# Altium PCB sigjumper-top.PcbDoc (part 4 of 5)
Units mil, origin at the board's own origin, x right, y up, seen from the top; angles counter-clockwise.
Board outline 7874.02 x 2559.06 mil, 14 copper layers (TOP, P1(GND), S1(V), P2(GND), S2(H), P3(GND), S3(V12/V2V5), S4(VDDR), P4(GND), S5(V), P5(GND), S6(H), P6(GND), BOT), stack 115.1 mil thick; 22 components, 186 nets, 824 pads, 732 vias.
Unrouted connection lines stored in the file: 341.
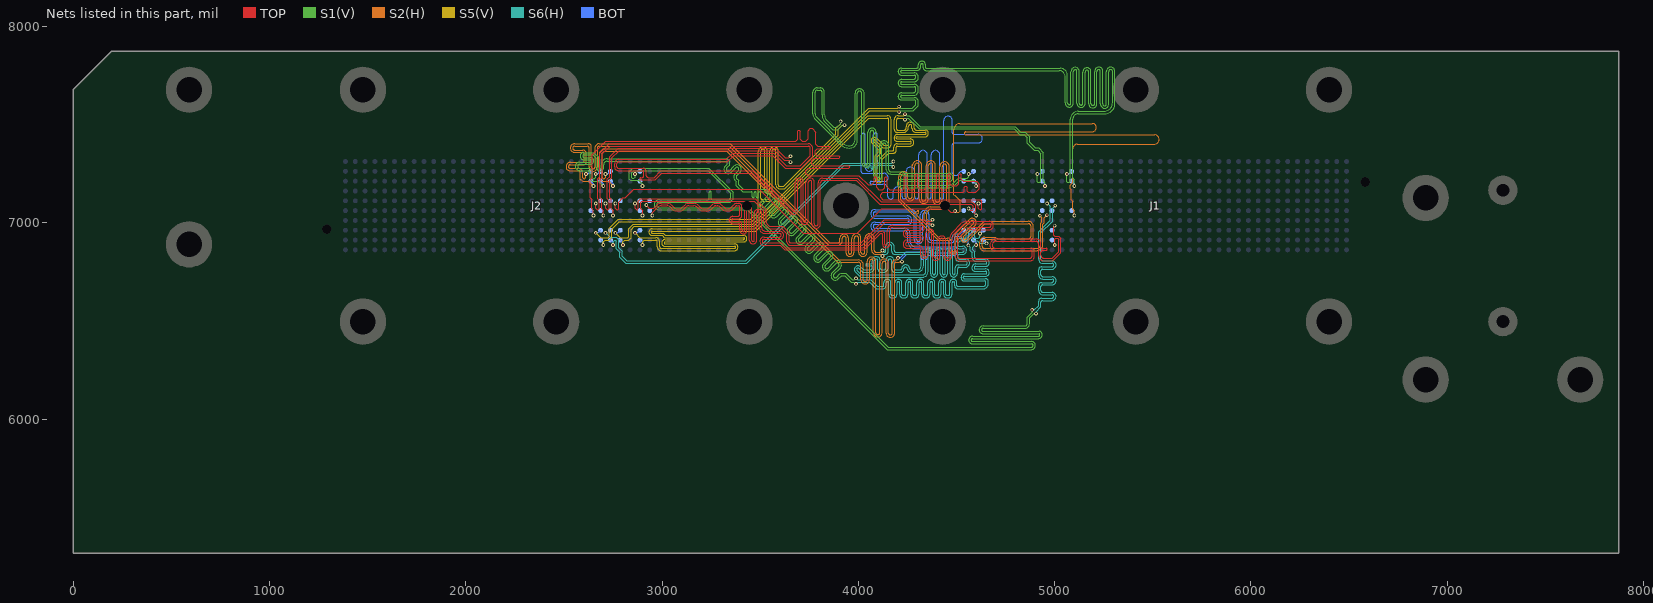
[diagram p16: the nets of this part, all layers, seen from the top]

## Via types
v1: diameter 19, hole 10, TOP to BOT, tented both sides, 732 vias

## Nets (pads, with @x,y where several pads share a name; then routed paths per layer and width w, separated by ;. In a path a pad name is that pad's centre, name@x,y a point inside that pad or via, vN(x,y) a via of type N, cw(c..) or ccw(c..) an arc to the next point about the centre after c; other vN are vias at no path point) (continued)
IL1.DDR.G2.D4_P: J1.375 J2.255 | length 5775.4
  TOP w4: v1(2650.7,7036.61) 2650.7,7061.3 2642,7070 2642,7119.97 2634,7127.97 2634,7219 2645,7230 2645,7345 2714,7414 3680,7414 3690,7424 3690,7467 3695,7472 3698,7472 3703,7467 3703,7426.03 3715.03,7414 3730.97,7414 3745,7428.03 3745,7469.03 3755.97,7480 3764.09,7480 3783,7461.09 3783,7400.03 3793.03,7390 3853.03,7390 3858.03,7385 3858.03,7382 3853.03,7377 3790.03,7377 3780,7366.97 3780,7350.03 3790.03,7340 3900.03,7340 3905.03,7335 3905.03,7332 3900.03,7327 3775,7327 3762.97,7314.97 3762.97,7300.03 3773,7290 3950.03,7290 3955.03,7285 3955.03,7282 3950.03,7277 3745.03,7277 3733,7264.97 3733,7252.03 3745.03,7240 4003.03,7240 4050.03,7193 4068,7193 4079.97,7204.97 4079.97,7228 4084.97,7233 4087.97,7233 4092.97,7228 4092.97,7180.03 4105,7168 4124.97,7168 4134.97,7178 4134.97,7228 4139.97,7233 4142.97,7233 4147.97,7228 4147.97,7180.03 4160,7168 4225,7168 4235,7178 4235,7228 4240,7233 4243,7233 4248,7228 4248,7180.03 4260.03,7168 4280,7168 4290,7178 4290,7245 4295,7250 4298,7250 4303,7245 4303,7180.03 4315.03,7168 4335,7168 4345,7178 4345,7245 4350,7250 4353,7250 4358,7245 4358,7180.03 4370.03,7168 4390,7168 4400,7178 4400,7245 4405,7250 4408,7250 4413,7245 4413,7180.03 4425.03,7168 4444.97,7168 4454.97,7178 4454.97,7245 4459.97,7250 4462.97,7250 4467.97,7245 4467.97,7197.06 4478.03,7187 4500,7187 4511.97,7198.97 4511.97,7245 4516.97,7250 4519.97,7250 4524.97,7245 4524.97,7230 4524.97,7220.06 4535.03,7210 4603.03,7210 4616.51,7196.51 4616.51,7173.49 4598.03,7155 4560,7155 4555,7160 4555,7181 4550,7186 4545,7186 4540,7181 4540,7160 4535,7155 4125.03,7155 4113,7142.97 4113,7130.03 4125.03,7118 4620.03,7118 4629.61,7108.42 4629.61,7070 4624.61,7065 4619.61,7065 4611.81,7072.8 v1(4611.81,7098.11)
  BOT w4: J2.255@2637.21,7061.61 2650.71,7048.11 v1(2650.7,7036.61) ; v1(4611.81,7098.11) 4623.31,7098.11 J1.375@4636.81,7111.61
IL1.DDR.G2.S_N: J1.379 J2.259 | length 5807.9
  S2(H) w4: 2555,7390 2620,7390 cw(c2620,7382) 2628,7382 2628,7285 ccw(c2650,7285) 2650,7263 ccw(c2650,7283) 2670,7283 2670,7380 cw(c2680,7380) 2680,7390 3343.03,7390 3848.03,6885 3895,6885 ccw(c3895,6908) 3918,6908 3918,6920.11 cw(c3928,6920.04) 3938,6920.04 ; 2555.02,7390 ccw(c2555.02,7380) 2554.96,7370 2595,7370 cw(c2595,7350) 2615,7350 2615,7310.03 cw(c2599.97,7310.03) 2599.97,7295 2533,7295 ccw(c2533,7285) 2523,7285 ccw(c2531,7285) 2531,7277 2573,7277 cw(c2573,7255) 2595,7255 2595,7230 2600,7225 2605,7225 2612.2,7232.2 v1(2612.2,7248.11) ; 3938,6920 3938,6845 ccw(c3955,6845) 3955,6828 3956.05,6828 ccw(c3956.05,6849.96) 3978,6849.96 3978,6918.96 cw(c3991,6918.96) 3991,6931.96 cw(c3991,6921.96) 4001,6921.96 4001,6849.93 ccw(c4023,6849.96) 4045,6849.96 4045,6918.96 cw(c4058,6918.96) 4058,6931.96 cw(c4058,6921.96) 4068,6921.96 4068,6859.93 ccw(c4090,6860) 4090,6838 4115,6838 v1(4123,6830)
  S6(H) w4: v1(4123,6830) 4131,6838 4135,6838 ccw(c4135,6855) 4152,6855 4152,6880 cw(c4160,6880) 4160,6888 cw(c4160,6878) 4170,6878 4170,6855.03 ccw(c4187.03,6855.03) 4187.03,6838 4312,6838 cw(c4312,6830) 4320,6830 4320,6780 cw(c4300,6780) 4300,6760 4267.08,6760 cw(c4267.08,6765.19) 4261.96,6764.36 ; 4261.89,6765.19 ccw(c4267.08,6765.19) 4261.96,6764.36 ; 4355,6855 4355,6854 ; 4368,6855 4368,6854 ; 4532,6880 4515,6880 cw(c4515,6890) 4505,6890 4505,6894.09 4518.91,6908 4540.07,6908 ccw(c4540,6930) 4562,6930 4562,6952 cw(c4570,6952) 4570,6960 cw(c4570,6950) 4580,6950 4580,6923.03 ccw(c4595.03,6923.03) 4595.03,6908 4605,6908 4618,6895 v1(4652.8,6895) ; 4532.03,6880 cw(c4532,6860) 4552,6860 cw(c4530,6860) 4530,6838 4513,6838 ccw(c4513,6830) 4505,6830 4505,6825 ccw(c4515,6825) 4515,6815 4547,6815 cw(c4547,6795) 4567,6795 cw(c4545,6795) 4545,6773 4513,6773 ccw(c4513,6765) 4505,6765 4505,6743 cw(c4485,6743) 4485,6723 cw(c4485,6740) 4468,6740 4468,6855 ccw(c4465,6855) 4465,6858 4460,6858 ccw(c4460,6853) 4455,6853 4455,6743 cw(c4435,6743) 4435,6723 cw(c4435,6740) 4418,6740 4418,6854 ccw(c4412,6854) 4412,6860 4411.03,6860 ccw(c4411.03,6853.97) 4405,6853.97 4405,6743 cw(c4385,6743) 4385,6723 cw(c4385,6740) 4368,6740 4368,6854 ; 4261.96,6764.36 ccw(c4240,6763) 4240,6785 ccw(c4240,6765) 4220,6765 cw(c4215,6765) 4215,6760 4190,6760 cw(c4190,6768) 4182,6768 4182,6805 ccw(c4160,6805) 4160,6827 ccw(c4160,6807) 4140,6807 4140,6770 cw(c4130,6770) 4130,6760 4120,6760 cw(c4120,6768) 4112,6768 4112,6805 ccw(c4090,6805) 4090,6827 ccw(c4090,6807) 4070,6807 4070,6795 cw(c4065,6795) 4065,6790 4042,6790 ccw(c4042,6785) 4037,6785 ccw(c4042,6785) 4042,6780 4065,6780 cw(c4065,6775) 4070,6775 4070,6770 cw(c4060,6770) 4060,6760 4026.21,6760 4010.27,6775.95 ccw(c3998.26,6763.91) 3986.24,6775.93 3984.12,6773.81 ccw(c3996.14,6761.79) 3984.1,6749.79 4010.89,6723 4328,6723 ccw(c4328,6750) 4355,6750 4355,6854 ; 4355,6854 cw(c4360,6854) 4360,6859 4363,6859 cw(c4363,6854) 4368,6854
  BOT w4: v1(2612.2,7248.11) 2623.71,7248.11 J2.259@2637.21,7261.61 ; J1.379@4636.81,6911.61 4650.31,6898.11 4650,6897.8 v1(4652.8,6895)
IL1.DDR.G2.S_P: J1.378 J2.258 | length 5804.8
  S2(H) w4: v1(2650.7,7186.61) 2627.32,7210 2595,7210 2583,7222 2583,7255 ccw(c2573,7255) 2573,7265 2531,7265 cw(c2531,7285) 2511,7285 cw(c2533,7285) 2533,7307 2595,7307 ccw(c2595,7315) 2603,7315 2603,7350 ccw(c2595,7350) 2595,7358 2555.02,7358 cw(c2555.02,7380) 2555,7402 2624.97,7402 cw(c2624.97,7386.97) 2640,7386.97 2640,7285 ccw(c2650,7285) 2650,7275 ccw(c2650,7283) 2658,7283 2658,7380 cw(c2680,7380) 2680,7402 3348,7402 3853,6897 3895,6897 ccw(c3895,6908) 3906,6908 3906,6920.04 cw(c3928,6920.04) 3950,6920.07 ; 3950,6920 3950,6845 ccw(c3955,6845) 3955,6840 3956.05,6840 ccw(c3956.05,6849.96) 3966,6849.96 3966,6918.96 cw(c3991,6918.96) 3991,6943.96 cw(c3991,6921.96) 4013,6921.96 4013,6849.96 ccw(c4023,6849.96) 4033,6849.89 ; 4033,6849.96 4033,6918.96 cw(c4058,6918.96) 4058,6943.96 cw(c4058,6921.96) 4080,6921.96 4080,6859.96 ccw(c4090,6860) 4090,6850 4115,6850 v1(4123,6858)
  S6(H) w4: v1(4123,6858) 4131,6850 4135,6850 ccw(c4135,6855) 4140,6855 4140,6880 cw(c4160,6880) 4160,6900 cw(c4160,6878) 4182,6878 4182,6860 ccw(c4192,6860) 4192,6850 4312,6850 cw(c4312,6830) 4332,6830 4332,6780 cw(c4300,6780) 4300,6748 4267.08,6748 cw(c4267.08,6765.19) 4250,6763.29 cw(c4267.08,6765.19) 4249.91,6764.32 ; 4249.89,6765.19 ccw(c4267.08,6765.19) 4249.91,6764.32 ; 4530,6850 4508.03,6850 ccw(c4508.03,6834.97) 4493,6834.97 4493,6825 ccw(c4515,6825) 4515,6803 4547,6803 cw(c4547,6795) 4555,6795 cw(c4545,6795) 4545,6785 4508.03,6785 ccw(c4508.03,6769.97) 4493,6769.97 4493,6743 cw(c4485,6743) 4485,6735 cw(c4485,6740) 4480,6740 4480,6855 ccw(c4465,6855) 4465,6870 4460,6870 ccw(c4460,6853) 4443,6853 4443,6743 cw(c4435,6743) 4435,6735 cw(c4435,6740) 4430,6740 4430,6852 ccw(c4410,6852) 4410,6872 ccw(c4410,6855) 4393,6855 4393,6743 cw(c4385,6743) 4385,6735 cw(c4385,6740) 4380,6740 4380,6854 ccw(c4363,6854) 4363,6871 4360,6871 ccw(c4360,6854) 4343,6854 4343,6750 cw(c4328,6750) 4328,6735 4015.86,6735 3992.59,6758.27 cw(c3996.14,6761.79) 3992.61,6765.32 3994.73,6767.44 cw(c3998.26,6763.91) 4001.78,6767.46 4021.24,6748 4060,6748 ccw(c4060,6770) 4082,6770 4082,6807 cw(c4090,6807) 4090,6815 cw(c4090,6805) 4100,6805 4100,6763.03 ccw(c4115.03,6763.03) 4115.03,6748 4130,6748 ccw(c4130,6770) 4152,6770 4152,6807 cw(c4160,6807) 4160,6815 cw(c4160,6805) 4170,6805 4170,6763.03 ccw(c4185.03,6763.03) 4185.03,6748 4215,6748 ccw(c4215,6765) 4232,6765 cw(c4240,6765) 4240,6773 cw(c4240,6763) 4249.91,6764.32 ; 4530.02,6850 ccw(c4530,6860) 4540,6860 ccw(c4532,6860) 4532,6868 4515,6868 cw(c4515,6890) 4493,6890 4493,6899.06 4513.94,6920 4540.04,6920 ccw(c4540,6930) 4550,6930 4550,6952 cw(c4570,6952) 4570,6972 cw(c4570,6950) 4592,6950 4592,6928 ccw(c4600,6928) 4599.96,6920 4605,6920 ccw(c4605,6935) 4620,6935 v1(4620,6944.8)
  BOT w4: J2.258@2637.21,7211.61 2650.71,7198.11 v1(2650.7,7186.61) ; v1(4620,6944.8) J1.378@4636.81,6961.61
IL1.DDR.G3.D0_N: J1.383 J2.263 | length 5845.7
  S1(V) w4: v1(3910,7516.31) 3910,7505 3890,7485 3875,7485 3839.02,7520.98 cw(c3868.04,7550) 3827,7550 3827,7665 ccw(c3805,7665) 3805,7687 3790,7687 ccw(c3790,7665) 3768,7665 3768,7555 ccw(c3806.56,7555) 3779.29,7527.74 3907.25,7399.78 ccw(c3955,7447.53) 3955,7380 ccw(c3955,7420) 3995,7420 3995,7660 cw(c4005,7660) 4005,7670 cw(c4005,7657) 4018,7657 4018,7303 ccw(c4038,7303) 4038,7283 ccw(c4038,7305) 4060,7305 4060,7460 cw(c4070,7460) 4070,7470 cw(c4070,7462) 4078,7462 4078,7240 ccw(c4100,7240) 4100,7218 ccw(c4100,7238) 4120,7238 4120,7395 cw(c4130,7395) 4130,7405 cw(c4130,7392) 4143,7392 4143,7270 ccw(c4165,7270) 4165,7248 4220.03,7248 4228.03,7240 4460,7240 cw(c4460,7230) 4470,7230 cw(c4462,7230) 4462,7222 4220,7222 ccw(c4220,7200) 4198,7200 ccw(c4220,7200) 4220,7178 4453.96,7178 ccw(c4453.96,7236.04) 4495,7195 4507.93,7207.93 cw(c4525,7190.86) 4525,7215 4590,7215 4600.31,7204.69 v1(4600.31,7186.61)
  S5(V) w4: v1(2662.2,6948.11) 2687.09,6923.23 2725,6923.23 2731,6929.23 2731,6971.97 2776.03,7017 3452.15,7017 3490.15,7055 3490.15,7362.15 cw(c3514.12,7362.15) 3514.12,7386.12 cw(c3514.12,7364.12) 3536.12,7364.12 3536.12,7164.12 ccw(c3541.12,7164.12) 3541.12,7159.12 3544.12,7159.12 ccw(c3544.12,7164.12) 3549.12,7164.12 3549.12,7366.12 cw(c3570,7366.12) 3570,7387 cw(c3570,7365) 3592,7365 3592,7193 ccw(c3600,7193) 3600,7185 3620,7185 3635,7200 3638.51,7203.51 3638.66,7203.51 3885,7449.85 3885,7480 3910,7505 v1(3910,7516.31)
  BOT w4: v1(2662.2,6948.11) 2673.71,6948.11 J2.263@2687.21,6961.61 ; J1.383@4586.81,7211.61 4600.32,7198.11 v1(4600.31,7186.61)
IL1.DDR.G3.D0_P: J1.382 J2.262 | length 5846.4
  S1(V) w4: v1(3929.8,7496.51) 3918.49,7496.51 3894.97,7473 3870.03,7473 3830.54,7512.49 cw(c3868.04,7550) 3815,7550 3815,7665 ccw(c3805,7665) 3805,7675 3790,7675 ccw(c3790,7665) 3780,7665 3780,7555 ccw(c3806.56,7555) 3787.78,7536.22 3915.74,7408.26 ccw(c3955,7447.53) 3955,7392 ccw(c3955,7420) 3983,7420 3983,7660 cw(c4005,7660) 4005,7682 cw(c4005,7657) 4030,7657 4030,7303 ccw(c4038,7303) 4038,7295 ccw(c4038,7305) 4048,7305 4048,7460 cw(c4070,7460) 4070,7482 cw(c4070,7462) 4090,7462 4090,7240 ccw(c4100,7240) 4100,7230 ccw(c4100,7238) 4108,7238 4108,7395 cw(c4130,7395) 4130,7417 cw(c4130,7392) 4155,7392 4155,7270 ccw(c4165,7270) 4165,7260 4225,7260 4233,7252 4460,7252 cw(c4460,7230) 4482,7230 cw(c4462,7230) 4462,7210 4220,7210 ccw(c4220,7200) 4210,7200 ccw(c4220,7200) 4220,7190 4453.96,7190 ccw(c4453.96,7236.04) 4486.51,7203.49 4499.44,7216.41 cw(c4525,7190.86) 4525,7227 4555,7227 4561.81,7233.81 v1(4561.81,7248.11)
  S5(V) w4: v1(2700.7,6886.61) 2700.7,6902.52 2709.41,6911.23 2729.97,6911.23 2743,6924.26 2743,6967 2781,7005 3457.12,7005 3502.15,7050.03 3502.15,7102.15 cw(c3510,7102.15) 3510,7110 3547,7110 ccw(c3547,7115) 3552,7115 ccw(c3547,7115) 3547,7120 3507.15,7120 cw(c3507.15,7125) 3502.15,7125 3502.15,7362.15 cw(c3514.12,7362.15) 3514.12,7374.12 cw(c3514.12,7364.12) 3524.12,7364.12 3524.12,7164.12 ; v1(3929.8,7496.51) 3918.49,7496.51 3897,7475.03 3897,7444.88 3643.63,7191.51 3643.49,7191.51 3624.97,7173 3600,7173 cw(c3600,7193) 3580,7193 3580,7365 ccw(c3570,7365) 3570,7375 ccw(c3570,7366.12) 3561.12,7366.12 3561.12,7164.12 cw(c3544.12,7164.12) 3544.12,7147.12 3541.12,7147.12 cw(c3541.12,7164.12) 3524.12,7164 ; 3524.12,7164 cw(c3541.12,7164.12) 3524.12,7164.12 ; 3524.12,7164 3524.12,7164.12
  BOT w4: J2.262@2687.21,6911.61 2700.71,6898.11 v1(2700.7,6886.61) ; v1(4561.81,7248.11) 4573.32,7248.11 J1.382@4586.81,7261.61
IL1.DDR.G3.D1_N: J1.386 J2.266 | length 5710
  TOP w4: v1(2662.2,7098.11) 2662.2,7072.8 2670,7065 2675,7065 2680,7070 2680,7115 2672,7123 2672,7223.97 2683,7234.97 2683,7354.97 2730.03,7402 3471.32,7402 3745,7402 cw(c3745,7380) 3767,7380 3767,7336.98 3707.99,7278 3628.06,7278 3564.06,7342 3363.97,7342 3331.97,7310 2780,7310 ccw(c2780,7300) 2770,7300 2770,7285 ccw(c2778,7285) 2778,7277 2903,7277 cw(c2903,7260) 2920,7260 2920,7240 ccw(c2930,7240) 2930,7230 2960.15,7230 2994.42,7264.27 3460.73,7264.27 3670,7055 ccw(c3670,7063) 3678,7063 3678,7205 cw(c3700,7205) 3700,7227 cw(c3700,7207) 3720,7207 3720,7008 ccw(c3725,7008) 3725,7003 ccw(c3725,7011) 3733,7011 3733,7205 cw(c3755,7205) 3755,7227 cw(c3755,7207) 3775,7207 3775,6993.85 ccw(c3785,6993.85) 3785,6983.85 ccw(c3785,6993.85) 3795,6993.85 3795,7203 cw(c3819.54,7203) 3819.54,7227.54 3993.7,7227.54 4116.12,7106 4580.97,7106 4597,7089.97 4597,7062.1 4589.95,7055.05 4589.95,7046.97 v1(4600.31,7036.61)
IL1.DDR.G3.D1_P: J1.385 J2.265 | length 5692.2
  TOP w4: v1(2700.7,7036.61) 2700.7,7061.3 2692,7070 2692,7119.97 2684,7127.97 2684,7219 2695,7230 2695,7350 2735,7390 3745,7390 cw(c3745,7380) 3755,7380 3755,7341.98 3703.02,7290 3633.03,7290 3569.03,7354 3359,7354 3327,7322 2780,7322 ccw(c2780,7300) 2758,7300 2758,7285 ccw(c2778,7285) 2778,7265 2903,7265 cw(c2903,7260) 2908,7260 2908,7240 cw(c2898,7240) 2898,7230 ; 2897.57,7230 2892,7230 ccw(c2892,7224) 2886,7224 ccw(c2892,7224) 2892,7218 2965.12,7218 2999.39,7252.27 3454.7,7252.27 3663.97,7043 3672,7043 ccw(c3672,7061) 3690,7061 3690,7205 cw(c3700,7205) 3700,7215 cw(c3700,7207) 3708,7207 3708,7008 ccw(c3725,7008) 3725,6991 ccw(c3725,7011) 3745,7011 3745,7205 cw(c3755,7205) 3755,7215 cw(c3755,7207) 3763,7207 3763,6993.85 ccw(c3785,6993.85) 3785,6971.85 ccw(c3785,6993.85) 3807,6993.85 3807,7203 cw(c3819.54,7203) 3819.54,7215.54 3988.6,7215.54 4110.15,7094 ; 4111.15,7094 4576,7094 4585,7085 4585,7067.07 4581.47,7063.53 4570.95,7063.53 v1(4561.81,7072.68)
IL1.DDR.G3.D2_N: J1.389 J2.269 | length 5811.2
  S1(V) w4: v1(2662.2,7248.11) 2662.2,7232.2 2655,7225 2650,7225 2645,7230 2645,7255 ccw(c2623,7255) 2623,7277 2580,7277 cw(c2580,7287) 2570,7287 cw(c2580,7287) 2580,7297 2634,7297 ccw(c2634,7315) 2652,7315 ccw(c2635,7315) 2635,7332 2603,7332 cw(c2603,7340) 2595,7340 cw(c2600,7340) 2600,7345 2648.03,7345 2665,7328.03 2665,7283 ccw(c2685,7283) 2685,7263 ccw(c2685,7280) 2702,7280 2702,7295 cw(c2720.29,7295) 2720.29,7313.29 3326.71,7313.29 3331.82,7308.18 3331.82,7298.18 3321.39,7287.75 ccw(c3336.94,7272.2) 3321.39,7256.64 ccw(c3336.94,7272.2) 3352.5,7256.64 ; 3352.37,7256.77 3374.9,7279.3 cw(c3381.94,7272.2) 3389.01,7279.27 cw(c3381.94,7272.2) 3389.01,7265.13 3371.51,7247.63 ccw(c3387.07,7232.07) 3371.51,7216.51 3378,7210.03 3378,7188.97 3409.97,7157 3454,7157 cw(c3454,7151) 3460,7151 3460,7132 ccw(c3465,7132) 3465,7127 ccw(c3465,7132) 3470,7132 3470,7152 cw(c3475,7152) 3475,7157 cw(c3475,7151) 3481,7151 3481,7131 ccw(c3486,7131) 3486,7126 ccw(c3486,7131) 3491,7131 3491,7152 cw(c3496,7152) 3496,7157 3528,7157 3538,7147 3538,7138 3502.5,7102.5 ccw(c3518.06,7086.94) 3502.5,7071.39 ccw(c3518.06,7086.94) 3533.61,7071.39 ; 3533.49,7071.51 3570.99,7109.01 cw(c3578.06,7101.94) 3585.13,7109.01 cw(c3578.06,7101.94) 3585.13,7094.87 3552.63,7062.37 ccw(c3568.18,7046.82) 3552.63,7031.26 ccw(c3568.18,7046.82) 3583.74,7031.26 ; 3583.61,7031.39 3616.11,7063.89 cw(c3623.18,7056.82) 3630.25,7063.89 cw(c3623.18,7056.82) 3630.25,7049.75 3597.75,7017.25 ccw(c3613.31,7001.69) 3597.75,6986.13 ccw(c3613.31,7001.69) 3628.87,6986.13 ; 3628.74,6986.26 3661.24,7018.76 cw(c3668.31,7011.69) 3675.38,7018.76 cw(c3668.31,7011.69) 3675.38,7004.62 3642.88,6972.12 ccw(c3658.44,6956.56) 3642.88,6941.01 ccw(c3658.44,6956.56) 3673.99,6941.01 ; 3673.87,6941.13 3706.37,6973.63 cw(c3713.44,6966.56) 3720.51,6973.63 cw(c3713.44,6966.56) 3720.51,6959.49 3688.01,6926.99 ccw(c3703.57,6911.43) 3688.01,6895.88 ccw(c3703.57,6911.43) 3719.12,6895.88 ; 3718.99,6896.01 3751.49,6928.51 cw(c3758.57,6921.43) 3765.64,6928.51 cw(c3758.57,6921.43) 3765.64,6914.36 3733.14,6881.86 ccw(c3748.69,6866.31) 3733.14,6850.75 ccw(c3748.69,6866.31) 3764.25,6850.75 ; 3764.12,6850.88 3796.62,6883.38 cw(c3803.69,6876.31) 3810.76,6883.38 cw(c3803.69,6876.31) 3810.76,6869.24 3778.26,6836.74 ccw(c3793.82,6821.18) 3778.26,6805.62 ccw(c3793.82,6821.18) 3809.38,6805.62 ; 3809.25,6805.75 3841.75,6838.25 cw(c3848.82,6831.18) 3855.89,6838.25 cw(c3848.82,6831.18) 3855.89,6824.11 3823.39,6791.61 ccw(c3838.95,6776.05) 3823.39,6760.5 ccw(c3838.95,6776.05) 3854.5,6760.5 ; 3854.38,6760.62 3885.3,6791.55 ; 3886.88,6793.12 3885.3,6791.55 ; 3897.9,6713.89 3914.5,6730.5 3929.5,6730.5 3963.5,6696.5 3980,6696.5 v1(3988,6688.5) ; 3898.02,6713.76 cw(c3882.47,6729.32) 3866.91,6713.76 cw(c3882.47,6729.32) 3866.91,6744.87 3899.41,6777.37 ccw(c3892.34,6784.44) 3899.41,6791.51 ccw(c3892.34,6784.44) 3885.3,6791.55
  S6(H) w4: v1(3988,6688.5) 3996,6696.5 4058.5,6696.5 4092,6663 4124.5,6663 ccw(c4124,6680) 4141,6680 4141,6694 cw(c4146,6694) 4146,6699 4149,6699 cw(c4149,6694) 4154,6694 4154,6635 ccw(c4171,6635) 4171,6618 4180,6618 ccw(c4180,6635) 4197,6635 4197,6694 cw(c4202,6694) 4202,6699 4205,6699 cw(c4205,6694) 4210,6694 4210,6635 ccw(c4227,6635) 4227,6618 4236,6618 ccw(c4236,6635) 4253,6635 4253,6694 cw(c4258,6694) 4258,6699 4261,6699 cw(c4261,6694) 4266,6694 4266,6635 ccw(c4283,6635) 4283,6618 4292,6618 ccw(c4292,6635) 4309,6635 4309,6694 cw(c4314,6694) 4314,6699 4317,6699 cw(c4317,6694) 4322,6694 4322,6635 ccw(c4339,6635) 4339,6618 4348,6618 ccw(c4348,6635) 4365,6635 4365,6694 cw(c4370,6694) 4370,6699 4373,6699 cw(c4373,6694) 4378,6694 4378,6635 ccw(c4395,6635) 4395,6618 4404,6618 ccw(c4404,6635) 4421,6635 4421,6694 cw(c4426,6694) 4426,6699 4429,6699 cw(c4429,6694) 4434,6694 4434,6635 ccw(c4451,6635) 4451,6618 4460,6618 ccw(c4460,6635) 4477,6635 4477,6694 cw(c4482,6694) 4482,6699 4485,6699 cw(c4485,6694) 4490,6694 4490,6680 ccw(c4507,6680) 4507,6663 4635,6663 ccw(c4635,6690) 4662,6690 4662,6700 ccw(c4647,6700) 4647,6715 4540,6715 cw(c4540,6720) 4535,6720 4535,6723 cw(c4540,6723) 4540,6728 4650,6728 ccw(c4650,6745) 4667,6745 ccw(c4647,6745) 4647,6765 4595,6765 cw(c4595,6770) 4590,6770 cw(c4598,6770) 4598,6778 4650,6778 ccw(c4650,6795) 4667,6795 ccw(c4647,6795) 4647,6815 4600,6815 cw(c4600,6823) 4592,6823 4592,6853 4590,6855 4582.12,6862.88 4582.12,6874.12 4594.61,6886.61 v1(4600.31,6886.61)
  BOT w4: v1(2662.2,7248.11) 2673.71,7248.11 J2.269@2687.21,7261.61 ; J1.389@4586.81,6911.61 4600.32,6898.11 v1(4600.31,6886.61)
IL1.DDR.G3.D2_P: J1.388 J2.268 | length 5810.7
  S1(V) w4: v1(2700.7,7186.61) 2677.32,7210 2645,7210 2633,7222 2633,7255 ccw(c2623,7255) 2623,7265 2580,7265 cw(c2580,7287) 2558,7287 cw(c2580,7287) 2580,7309 2634,7309 ccw(c2634,7315) 2640,7315 ccw(c2635,7315) 2635,7320 2603,7320 cw(c2603,7340) 2583,7340 cw(c2600,7340) 2600,7357 2653,7357 2677,7333 2677,7283 ccw(c2685,7283) 2685,7275 ccw(c2685,7280) 2690,7280 2690,7295 cw(c2720.29,7295) 2720.29,7325.29 3331.68,7325.29 3343.82,7313.15 3343.82,7293.21 3340.3,7289.7 3329.87,7279.27 ccw(c3336.94,7272.2) 3329.87,7265.13 ccw(c3336.94,7272.2) 3344.01,7265.13 ; 3343.89,7265.25 3366.43,7287.79 ; 3366.39,7287.75 cw(c3381.94,7272.2) 3366.43,7287.79 ; 3525,7080 3562.5,7117.5 cw(c3578.06,7101.94) 3593.61,7117.5 cw(c3578.06,7101.94) 3593.61,7086.39 3561.11,7053.89 ccw(c3568.18,7046.82) 3561.11,7039.75 ccw(c3568.18,7046.82) 3575.25,7039.75 ; 3525.13,7079.87 cw(c3518.06,7086.94) 3510.99,7079.87 cw(c3518.06,7086.94) 3510.99,7094.01 3543.49,7126.51 3550,7133.03 3550,7151.97 3531.97,7170 3413.94,7170 3390,7193.94 3390,7215 3380,7225 cw(c3387.07,7232.07) 3380,7239.14 3397.5,7256.64 ccw(c3381.94,7272.2) 3397.5,7287.75 ccw(c3381.94,7272.2) 3366.43,7287.79 ; 3575.13,7039.87 3607.63,7072.37 cw(c3623.18,7056.82) 3638.74,7072.37 cw(c3623.18,7056.82) 3638.74,7041.26 3606.24,7008.76 ccw(c3613.31,7001.69) 3606.24,6994.62 ccw(c3613.31,7001.69) 3620.38,6994.62 ; 3620.25,6994.75 3652.75,7027.25 cw(c3668.31,7011.69) 3683.87,7027.25 cw(c3668.31,7011.69) 3683.87,6996.13 3651.37,6963.63 ccw(c3658.44,6956.56) 3651.37,6949.49 ccw(c3658.44,6956.56) 3665.51,6949.49 ; 3665.38,6949.62 3697.88,6982.12 cw(c3713.44,6966.56) 3728.99,6982.12 cw(c3713.44,6966.56) 3728.99,6951.01 3696.49,6918.51 ccw(c3703.57,6911.43) 3696.49,6904.36 ccw(c3703.57,6911.43) 3710.64,6904.36 ; 3710.51,6904.49 3743.01,6936.99 cw(c3758.57,6921.43) 3774.12,6936.99 cw(c3758.57,6921.43) 3774.12,6905.88 3741.62,6873.38 ccw(c3748.69,6866.31) 3741.62,6859.24 ccw(c3748.69,6866.31) 3755.76,6859.24 ; 3755.64,6859.36 3788.14,6891.86 cw(c3803.69,6876.31) 3819.25,6891.86 cw(c3803.69,6876.31) 3819.25,6860.75 3786.75,6828.25 ccw(c3793.82,6821.18) 3786.75,6814.11 ccw(c3793.82,6821.18) 3800.89,6814.11 ; 3800.76,6814.24 3833.26,6846.74 cw(c3848.82,6831.18) 3864.38,6846.74 cw(c3848.82,6831.18) 3864.38,6815.62 3831.88,6783.12 ccw(c3838.95,6776.05) 3831.88,6768.98 ccw(c3838.95,6776.05) 3846.02,6768.98 ; 3845.89,6769.11 3876.82,6800.04 ; 3876.78,6800 cw(c3892.34,6784.44) 3876.82,6800.04 ; 3878.39,6801.61 3876.82,6800.04 ; 3889.41,6722.37 3906.02,6738.98 3909.53,6742.5 3934.47,6742.5 3968.47,6708.5 3980,6708.5 v1(3988,6716.5) ; 3889.54,6722.25 cw(c3882.47,6729.32) 3875.4,6722.25 cw(c3882.47,6729.32) 3875.4,6736.39 3907.9,6768.89 ccw(c3892.34,6784.44) 3907.9,6800 ccw(c3892.34,6784.44) 3876.82,6800.04
  S6(H) w4: v1(3988,6716.5) 3996,6708.5 4063.47,6708.5 4096.97,6675 4124.5,6675 ; 4124,6675 ccw(c4124,6680) 4129,6680 4129,6694 cw(c4146,6694) 4146,6711 4149,6711 cw(c4149,6694) 4166,6694 4166,6635 ccw(c4171,6635) 4171,6630 4180,6630 ccw(c4180,6635) 4185,6635 4185,6694 cw(c4202,6694) 4202,6711 4205,6711 cw(c4205,6694) 4222,6694 4222,6635 ccw(c4227,6635) 4227,6630 4236,6630 ccw(c4236,6635) 4241,6635 4241,6694 cw(c4258,6694) 4258,6711 4261,6711 cw(c4261,6694) 4278,6694 4278,6635 ccw(c4283,6635) 4283,6630 4292,6630 ccw(c4292,6635) 4297,6635 4297,6694 cw(c4314,6694) 4314,6711 4317,6711 cw(c4317,6694) 4334,6694 4334,6635 ccw(c4339,6635) 4339,6630 4348,6630 ccw(c4348,6635) 4353,6635 4353,6694 cw(c4370,6694) 4370,6711 4373,6711 cw(c4373,6694) 4390,6694 4390,6635 ccw(c4395,6635) 4395,6630 4404,6630 ccw(c4404,6635) 4409,6635 4409,6694 cw(c4426,6694) 4426,6711 4429,6711 cw(c4429,6694) 4446,6694 4446,6635 ccw(c4451,6635) 4451,6630 4460,6630 ccw(c4460,6635) 4465,6635 4465,6694 cw(c4482,6694) 4482,6711 4485,6711 cw(c4485,6694) 4502,6694 4502,6680 ccw(c4507,6680) 4507,6675 4635,6675 ccw(c4635,6690) 4650,6690 4650,6695 ccw(c4642,6695) 4642,6703 4540,6703 cw(c4540,6720) 4523,6720 4523,6723 cw(c4540,6723) 4540,6740 4650,6740 ccw(c4650,6745) 4655,6745 ccw(c4647,6745) 4647,6753 4595,6753 cw(c4595,6770) 4578,6770 cw(c4598,6770) 4598,6790 4650,6790 ccw(c4650,6795) 4655,6795 ccw(c4647,6795) 4647,6803 4600,6803 cw(c4600,6823) 4580,6823 4580,6848.03 4570.12,6857.9 4570.12,6874.88 v1(4560,6885)
  BOT w4: J2.268@2687.21,7211.61 2700.71,7198.11 v1(2700.7,7186.61) ; v1(4560,6885) 4560,6934.8 J1.388@4586.81,6961.61
IL1.DDR.G3.D3_N: J1.393 J2.273 | length 1772.7
  S6(H) w4: v1(2712.2,6948.11) 2735.59,6924.73 2767.91,6924.73 2779.91,6912.73 2779.91,6872.06 2797,6854.97 2797,6830 2821,6806 3426,6806 3924,7304 4170,7304 v1(4178,7312)
IL1.DDR.G3.D3_P: J1.392 J2.272 | length 5823.9
  S6(H) w4: v1(2750.7,6886.61) 2750.7,6902.52 2757.91,6909.73 2762.91,6909.73 2767.91,6904.73 2767.91,6867.09 2785,6850 2785,6825.03 2816.03,6794 3430.97,6794 3928.97,7292 4040,7292 cw(c4040,7287) 4045,7287 4045,7283.5 ccw(c4050,7283.5) 4050,7278.5 ccw(c4050,7283.5) 4055,7283.5 4055,7287 cw(c4060,7287) 4060,7292 cw(c4060,7287) 4065,7287 4065,7278.5 ccw(c4070,7278.5) 4070,7273.5 ccw(c4070,7278.5) 4075,7278.5 4075,7287 cw(c4080,7287) 4080,7292 cw(c4080,7287) 4085,7287 4085,7278.5 ccw(c4090,7278.5) 4090,7273.5 ccw(c4090,7278.5) 4095,7278.5 4095,7287 cw(c4100,7287) 4100,7292 4170,7292 v1(4178,7284)
  BOT w4: J2.272@2737.21,6911.61 2750.71,6898.11 v1(2750.7,6886.61) ; v1(4178,7284) 4170,7292 4121,7292 cw(c4121,7316) 4097,7316 4097,7447 ccw(c4087,7447) 4087,7457 ccw(c4087,7447) 4077,7447 4077,7285 cw(c4055,7285) 4055,7263 cw(c4055,7283) 4035,7283 4035,7445 ccw(c4025,7445) 4025,7455 ccw(c4025,7445) 4015,7445 4015,7260 ccw(c4023,7260) 4023,7252 4130,7252 cw(c4130,7230) 4152,7230 cw(c4132,7230) 4132,7210 4065,7210 ccw(c4065,7205) 4060,7205 4060,7202 ccw(c4065,7202) 4065,7197 4125,7197 cw(c4125,7172) 4150,7172 4150,7135 ccw(c4165,7135) 4165,7120 ccw(c4165,7133) 4178,7133 4178,7160 cw(c4200,7160) 4200,7182 cw(c4200,7159) 4223,7159 4223,7131 ccw(c4233,7131) 4243,7131 4243,7261 cw(c4265,7261) 4287,7261 4287,7130.94 ; 4287,7130 4287,7130.94 ; 4287,7131 ccw(c4297,7131) 4287,7130.94 ; 4307,7130 4307,7346 cw(c4329,7346) 4351,7346 4351,7131 ccw(c4361,7131) 4371,7131 ; 4307,7131 cw(c4297,7131) 4287,7130.94 ; 4371,7130 4371,7346 cw(c4393,7346) 4415,7346 4415,7130 ccw(c4425,7130) 4425,7120 ccw(c4425,7130) 4435,7130 4435,7520 cw(c4457,7520) 4479,7520 4479,7458.4 ccw(c4487.4,7458.4) 4487.4,7450 4610,7450 cw(c4610,7428) 4610,7406 4489,7406 ccw(c4489,7396) 4479,7396 4479,7253.61 ccw(c4490,7253.61) 4490,7242.61 4503.31,7242.61 4522.31,7261.61 J1.392@4536.81,7261.61
IL1.DDR.G3.D4_N: J1.396 J2.276 | length 1284
  TOP w4: v1(2712.2,7098.11) 2712.2,7072.8 2720,7065 2725,7065 2730,7070 2730,7115 2722,7123 2722,7223.97 2733,7234.97 2733,7334.97 2776.03,7378 3578.97,7378 3626.97,7330 3646.13,7330 v1(3654.56,7338.43)
IL1.DDR.G3.D4_P: J1.395 J2.275 | length 1253.2
  TOP w4: v1(2750.7,7036.61) 2750.7,7061.3 2742,7070 2742,7119.97 2734,7127.97 2734,7219 2745,7230 2745,7330 2781,7366 3574,7366 3622,7318 3645,7318 v1(3654.56,7308.43)
IL1.DDR.G3.S_N: J1.399 J2.279 | length 5928.9
  S2(H) w4: v1(2712.2,7248.11) 2712.2,7232.2 2705,7225 2700,7225 2695,7230 2695,7355 2705,7365 3329.09,7365 3896.09,6798 4000,6798 cw(c4000,6785) 4013,6785 4013,6710 ccw(c4035,6710) 4057,6710 4057,6803 cw(c4067,6803) 4077,6803 4077,6440 ccw(c4099,6440) 4121,6440 4121,6793 cw(c4131,6793) 4141,6793 ; 4141,6792.29 4141,6438 ccw(c4163,6438) 4185,6438 4185,6793 cw(c4190,6793) 4190,6798 4207,6798 4210.49,6801.51 v1(4221.8,6801.51)
  BOT w4: v1(2712.2,7248.11) 2723.71,7248.11 J2.279@2737.21,7261.61 ; v1(4221.8,6801.51) 4221.8,6812.83 4246.97,6838 4314,6838 cw(c4314,6832) 4320,6832 4320,6818 ccw(c4325,6818) 4325,6813 ccw(c4325,6818) 4330,6818 4330,6830 cw(c4335,6830) 4335,6835 cw(c4335,6830) 4340,6830 4340,6818 ccw(c4345,6818) 4345,6813 ccw(c4345,6819.21) 4351.21,6819.21 ; 4351.21,6819 4351.21,6830.21 cw(c4355,6830.21) 4355,6834 4485,6834 ccw(c4485,6856) 4485,6878 4290,6878 cw(c4290,6904) 4264,6904 4264,6942 ccw(c4235,6942) 4235,6971 4085,6971 cw(c4085,6981) 4085,6991 4250,6991 ccw(c4250,7013) 4250,7035 4085,7035 cw(c4085,7045) 4085,7055 4269,7055 cw(c4269,7040) 4284,7040 4284,6915 ccw(c4306,6915) 4328,6915 4328,7040 cw(c4338,7040) 4348,7040 4348,6925 ccw(c4375,6925) 4375,6898 4473,6898 ccw(c4473,6915) 4490,6915 4490,6925 cw(c4495.61,6925) 4495.61,6930.61 4517.81,6930.61 J1.399@4536.81,6911.61
IL1.DDR.G3.S_P: J1.398 J2.278 | length 5929.1
  S2(H) w4: v1(2750.7,7186.61) 2727.32,7210 2695,7210 2683,7222 2683,7359.97 2700.03,7377 3334.06,7377 3901.06,6810 4000,6810 cw(c4000,6785) 4025,6785 4025,6710 ccw(c4035,6710) 4045,6709.94 ; 4045,6710 cw(c4035,6710) 4045,6709.94 ; 4109,6792.29 4109,6440 cw(c4099,6440) 4089,6440 4089,6803 ccw(c4067,6803) 4045,6803 4045,6709.94 ; 4109,6793 cw(c4131,6793) 4153,6793 4153,6438 ccw(c4163,6438) 4173,6438 4173,6793 cw(c4190,6793) 4190,6810 4199,6810 4202,6813 v1(4202,6821.31)
  BOT w4: J2.278@2737.21,7211.61 2750.71,7198.11 v1(2750.7,7186.61) ; v1(4202,6821.31) 4213.31,6821.31 4243,6851 4359,6851 4364,6846 4485,6846 ccw(c4485,6856) 4485,6866 4290,6866 cw(c4290,6904) 4252,6904 4252,6942 ccw(c4235,6942) 4235,6959 4085,6959 cw(c4085,6981) 4085,7003 4250,7003 ccw(c4250,7013) 4250,7023 4085,7023 cw(c4085,7045) 4085,7067 4269,7067 cw(c4269,7040) 4296,7040 4296,6915 ccw(c4306,6915) 4316,6915 4316,7040 cw(c4338,7040) 4360,7040 4360,6925 ccw(c4375,6925) 4375,6910 4473,6910 ccw(c4473,6915) 4478,6915 4478,6925 cw(c4495.61,6925) 4495.61,6942.61 4517.81,6942.61 J1.398@4536.81,6961.61
IL1.SDR.G8.D0_N: J1.309 J2.316 | length 5716.6
  TOP w4: v1(2920,7090) 2920.32,7090 2935.77,7074.54 2957.57,7074.54 2970.37,7087.34 cw(c2995,7062.71) 2995,7097.54 3029.97,7097.54 cw(c3029.97,7073.4) 3047.04,7090.47 3058.81,7078.71 ccw(c3075,7094.9) 3075,7072 3087.83,7072 ccw(c3087.83,7094.14) 3103.49,7078.49 3115.03,7090.03 cw(c3134.27,7070.79) 3134.27,7098 3161.51,7098 cw(c3161.51,7065.52) 3184.49,7088.49 3194.59,7078.39 ccw(c3210,7093.8) 3210,7072 3230.62,7072 ccw(c3230.62,7087.41) 3241.5,7076.5 3255.22,7090.22 cw(c3274,7071.44) 3274,7098 3285,7098 cw(c3285,7073.93) 3302.02,7090.95 3318.12,7074.85 ccw(c3325,7081.73) 3325,7072 3335.49,7072 ccw(c3335.49,7095.04) 3351.78,7078.75 3364,7090.97 cw(c3380.97,7074) 3380.97,7098 3390,7098 cw(c3390,7081) 3407,7081 3407,7040.03 cw(c3386.97,7040.03) 3386.97,7020 3360.03,7020 ccw(c3360.03,7015) 3355.03,7015 3355.03,7012 ccw(c3360.03,7012) 3360.03,7007 3390,7007 cw(c3390,6990) 3407,6990 3407,6963 ccw(c3415,6963) 3415,6955 ccw(c3415,6960) 3420,6960 3420,7080 cw(c3437,7080) 3437,7097 3440,7097 cw(c3440,7080) 3457,7080 3457,6910 ccw(c3462,6910) 3462,6905 3465,6905 ccw(c3465,6910) 3470,6910 3470,7050 cw(c3487,7050) 3487,7067 3490,7067 cw(c3490,7050) 3507,7050 3507,6975 ccw(c3525,6975) 3525,6957 3599,6957 cw(c3599,6937) 3619,6937 cw(c3597,6937) 3597,6915 3520,6915 ccw(c3520,6905) 3510,6905 ccw(c3518,6905) 3518,6897 3606.94,6897 3630.94,6873 4026.03,6873 4110.03,6957 4118,6957 cw(c4118,6940) 4135,6940 4135,6890 ccw(c4140,6890) 4140,6885 ccw(c4140,6893) 4148,6893 4148,6960 cw(c4175,6960) 4175,6987 4318,6987 cw(c4318,6970) 4335,6970 cw(c4315,6970) 4315,6950 4245,6950 ccw(c4245,6945) 4240,6945 ccw(c4248,6945) 4248,6937 4315,6937 cw(c4315,6920) 4332,6920 cw(c4312,6920) 4312,6900 4250,6900 ccw(c4250,6890) 4240,6890 ccw(c4248,6890) 4248,6882 4310,6882 cw(c4310,6862) 4330,6862 4330,6835 ccw(c4335,6835) 4335,6830 ccw(c4335,6838) 4343,6838 4343,6945 cw(c4365,6945) 4365,6967 cw(c4365,6947) 4385,6947 4385,6830 ccw(c4395,6830) 4395,6820 ccw(c4395,6828) 4403,6828 4403,6910 cw(c4425,6910) 4425,6932 cw(c4425,6912) 4445,6912 4445,6830 ccw(c4455,6830) 4455,6820 ccw(c4455,6828) 4463,6828 4463,6910 cw(c4522.07,6910) 4480.3,6951.77 4525.28,6996.75 cw(c4550.03,6972) 4550.03,7007 4666,7007 cw(c4666,6985) 4688,6985 cw(c4668,6985) 4668,6965 4578.28,6965 ccw(c4578.28,6903.79) 4535.02,6947.09 4520.61,6932.68 ccw(c4558.28,6895) 4505,6895 4505,6830 ccw(c4516,6830) 4516,6819 4874,6819 ccw(c4874,6830) 4885,6830 4885,6850 ccw(c4877,6850) 4877,6858 4697,6858 cw(c4697,6885) 4670,6885 cw(c4702,6885) 4702,6917 4905,6917 cw(c4905,6892) 4930,6892 4930,6875 ccw(c4935,6875) 4935,6870 4957,6870 cw(c4957,6865) 4962,6865 cw(c4957,6865) 4957,6860 4940,6860 ccw(c4940,6850) 4930,6850 4930,6834 ccw(c4945,6834) 4945,6819 4987.03,6819 5020,6851.97 5020,6915 5015,6920 5005.63,6920 5000.31,6914.69 v1(5000.31,6886.61)
IL1.SDR.G8.D0_P: J1.308 J2.315 | length 5716
  TOP w4: v1(2950.7,7036.61) 2950.7,7050.7 2978.86,7078.86 cw(c2995,7062.71) 2995,7085.54 3027.16,7085.54 cw(c3027.16,7066.62) 3040.53,7080.02 3051.29,7069.26 ccw(c3073.64,7091.61) 3073.64,7060 3090,7060 ccw(c3090,7088.9) 3110.42,7068.45 3123,7081.03 cw(c3135,7069.03) 3135,7086 3161.51,7086 cw(c3161.51,7065.52) 3175.98,7080.02 3186.1,7069.9 ccw(c3210,7093.8) 3210,7060 3230.62,7060 ccw(c3230.62,7087.41) 3250,7068.03 3263.71,7081.74 cw(c3274,7071.44) 3274,7086 3280.03,7086 cw(c3280.03,7061.93) 3297.03,7078.97 3309.64,7066.36 ccw(c3325,7081.73) 3325,7060 3340.46,7060 ccw(c3340.46,7083.04) 3356.75,7066.75 3372.49,7082.49 cw(c3380.97,7074) 3380.97,7086 3390,7086 cw(c3390,7081) 3395,7081 3395,7042 cw(c3385,7042) 3385,7032 3360.03,7032 ccw(c3360.03,7015) 3343.03,7015 3343.03,7012 ccw(c3360.03,7012) 3360.03,6995 3390,6995 cw(c3390,6990) 3395,6990 3395,6963 ccw(c3415,6963) 3415,6943 ccw(c3415,6960) 3432,6960 3432,7080 cw(c3437,7080) 3437,7085 3440,7085 cw(c3440,7080) 3445,7080 3445,6910 ccw(c3462,6910) 3462,6893 3465,6893 ccw(c3465,6910) 3482,6910 3482,7050 cw(c3487,7050) 3487,7055 3490,7055 cw(c3490,7050) 3495,7050 3495,6975 ccw(c3525,6975) 3525,6945 3599,6945 cw(c3599,6937) 3607,6937 cw(c3597,6937) 3597,6927 3520,6927 ccw(c3520,6905) 3498,6905 ccw(c3518,6905) 3518,6885 3601.97,6885 3625.97,6861 4031,6861 4105,6935 4115,6945 4118,6945 cw(c4118,6940) 4123,6940 4123,6890 ccw(c4140,6890) 4140,6873 ccw(c4140,6893) 4160,6893 4160,6960 cw(c4175,6960) 4175,6975 4318,6975 cw(c4318,6970) 4323,6970 cw(c4315,6970) 4315,6962 4245,6962 ccw(c4245,6945) 4228,6945 ccw(c4248,6945) 4248,6925 4315,6925 cw(c4315,6920) 4320,6920 cw(c4312,6920) 4312,6912 4250,6912 ccw(c4250,6890) 4228,6890 ccw(c4248,6890) 4248,6870 4310,6870 cw(c4310,6862) 4318,6862 4318,6835 ccw(c4335,6835) 4335,6818 ccw(c4335,6838) 4355,6838 4355,6945 cw(c4365,6945) 4365,6955 cw(c4365,6947) 4373,6947 4373,6830 ccw(c4395,6830) 4395,6808 ccw(c4395,6828) 4415,6828 4415,6910 cw(c4425,6910) 4425,6920 cw(c4425,6912) 4433,6912 4433,6830 ccw(c4455,6830) 4455,6808 ccw(c4455,6828) 4475,6828 4475,6910 cw(c4522.07,6910) 4488.79,6943.28 4530.25,6984.75 cw(c4555,6960) 4555,6995 4666,6995 cw(c4666,6985) 4676,6985 cw(c4668,6985) 4668.01,6977 4573.31,6977 ccw(c4573.31,6915.79) 4530.05,6959.09 4512.12,6941.16 ccw(c4558.28,6895) 4493,6895 4493,6830 ccw(c4518,6830) 4518,6805 4872,6805 ccw(c4872,6830) 4897,6830 4897,6850 ccw(c4877,6850) 4877,6870 4697,6870 cw(c4697,6885) 4682,6885 cw(c4702,6885) 4702,6905 4905,6905 cw(c4905,6892) 4918,6892 4918,6832 ccw(c4945,6832) 4945,6805 4990,6805 5032,6847 5032,6919.97 5019.97,6932 5000,6932 4996.1,6935.9 4996.1,6981.1 v1(5000,6985)
IL1.SDR.G8.D1_N: J1.313 J2.303 | length 5846.6
  S1(V) w4: v1(4238,7553) 4246,7545 4260,7545 4315,7490 4798.06,7490 4827.81,7460.26 4849.78,7460.26 4873.22,7436.82 4873.22,7408.51 4900.83,7380.91 4918.31,7380.91 4942,7357.21 4942,7211 4950.31,7202.69 v1(4950.31,7186.61)
  S5(V) w4: v1(2862.2,6948.11) 2887.09,6923.23 2968.77,6923.23 cw(c2968.77,6905) 2987,6905 2987,6878 ccw(c2995,6878) 2995,6870 3370,6870 ccw(c3370,6875) 3375,6875 ccw(c3370,6875) 3370,6880 3014.94,6880 ; 3015,6880 cw(c3015,6897) 3014.94,6880 ; 3015,6914 ccw(c3015,6897) 2998,6897 ccw(c3015,6897) 3014.94,6880 ; 3015.03,6914 3415.06,6914 ccw(c3415.06,6919) 3420.06,6919 ccw(c3415.06,6919) 3415.06,6924 3011,6924 3000,6935 2950,6935 cw(c2950,6952) 2933,6952 cw(c2950,6952) 2950,6969 3472.03,6969 4048.03,7545 4147,7545 cw(c4147,7525) 4167,7525 4167,7400 cw(c4149.04,7400) 4149.04,7382.04 4124.07,7382.04 4120.56,7385.56 4085.56,7420.56 ccw(c4082.02,7417.02) 4078.49,7420.56 ccw(c4082.02,7417.02) 4078.49,7413.49 4114.5,7377.47 4114.5,7354.5 4097,7337 4097,7223 ccw(c4105,7223) 4105,7215 ccw(c4105,7220) 4110,7220 4110,7326.97 4150.03,7367 4176,7367 ccw(c4176,7371) 4180,7371 4180,7385 cw(c4197,7385) 4197,7402 4264,7402 ccw(c4264,7408) 4270,7408 4270,7410 ccw(c4265,7410) 4265,7415 4197,7415 cw(c4197,7430) 4182,7430 4182,7432.94 cw(c4199.06,7432.94) 4199,7450 ; v1(4238,7553) 4230,7545 4203,7545 ccw(c4203,7525) 4183,7525 4183,7475 ccw(c4198,7475) 4198,7460 4230.03,7460 ccw(c4230.03,7484.97) 4255,7484.97 4255,7490 cw(c4265,7490) 4265,7500 cw(c4265,7492) 4273,7492 4273,7482 ccw(c4295,7482) 4295,7460 4340,7460 cw(c4340,7455) 4345,7455 cw(c4340,7455) 4340,7450 4199.06,7450 ; 4199,7450 cw(c4199.06,7432.94) 4199.06,7450 ; 4199,7450 4199.06,7450
  BOT w4: v1(2862.2,6948.11) 2873.71,6948.11 J2.303@2887.21,6961.61 ; J1.313@4936.81,7211.61 4950.32,7198.11 v1(4950.31,7186.61)
IL1.SDR.G8.D1_P: J1.312 J2.302 | length 5834.7
  S1(V) w4: v1(4238,7525) 4246,7533 4255.03,7533 4310.03,7478 4793.09,7478 4822.83,7448.26 4844.81,7448.26 4861.22,7431.85 4861.22,7403.54 4895.86,7368.91 4913.34,7368.91 4930,7352.24 4930,7210 4925,7205 4915,7205 4911.81,7208.19 v1(4911.81,7248.11)
  S5(V) w4: v1(2900.7,6886.61) 2900.7,6902.52 2909.41,6911.23 2968.77,6911.23 cw(c2968.77,6905) 2975,6905 2975,6878 ccw(c2995,6878) 2995,6858 3370,6858 ccw(c3370,6875) 3387,6875 ccw(c3370,6875) 3370,6892 3014.97,6892 cw(c3015,6897) 3010,6897 cw(c3015,6897) 3015,6902 3415.06,6902 ccw(c3415.06,6919) 3432.06,6919 ccw(c3415.06,6919) 3415.06,6936 3015.97,6936 3004.97,6947 2950,6947 cw(c2950,6952) 2945,6952 cw(c2950,6952) 2950,6957 3477,6957 4053,7533 4147,7533 cw(c4147,7525) 4155,7525 4155,7400 cw(c4149.04,7400) 4149.04,7394.04 4129.04,7394.04 4094.04,7429.04 ccw(c4082.02,7417.02) 4070,7429.04 ccw(c4082.02,7417.02) 4070,7405 4102.5,7372.5 4102.5,7359.47 4085,7341.97 4085,7223 ccw(c4105,7223) 4105,7203 ccw(c4105,7220) 4122,7220 4122,7322 4155,7355 4182,7355 ccw(c4182,7365) 4192,7365 4192,7385 cw(c4197,7385) 4197,7390 4264,7390 ccw(c4264,7408) 4282,7408 4282,7410 ccw(c4265,7410) 4265,7427 4197,7427 cw(c4197,7430) 4194,7430 4194,7433.97 cw(c4198.03,7433.97) 4198.03,7438 4340,7438 ccw(c4340,7455) 4357,7455 ccw(c4340,7455) 4340,7472 4295,7472 cw(c4295,7482) 4285,7482 4285,7493 ccw(c4266,7493) 4266,7512 4265,7512 ccw(c4265,7490) 4243,7490 4243,7480 cw(c4235,7480) 4235,7472 4200,7472 cw(c4200,7477) 4195,7477 4195,7525 cw(c4203,7525) 4203,7533 4230,7533 v1(4238,7525)
  BOT w4: J2.302@2887.21,6911.61 2900.71,6898.11 v1(2900.7,6886.61) ; v1(4911.81,7248.11) 4923.32,7248.11 J1.312@4936.81,7261.61
IL1.SDR.G8.D2_N: J1.316 J2.306 | length 5716.9
  TOP w4: v1(2862.2,7098.11) 2862.2,7072.8 2870,7065 2875,7065 2880,7070 2880,7109.97 2892.03,7122 3474.97,7122 3531,7065.97 3531,7004 ccw(c3553,7004) 3553,6982 3614.97,6982 3648,6948.97 3648,6904 ccw(c3655,6904) 3655,6897 4014.88,6897 4024.88,6907 4132.43,7014.54 4337.43,7014.54 4344.97,7007 4370,7007 v1(4378,7015)
  S2(H) w4: 4275,7290 cw(c4300,7290) 4275,7290.07 ; 4275,7294 4275,7290.07 ; v1(4378,7015) 4370,7007 4360.01,7007 4348.49,7018.53 4348.49,7045 cw(c4371.49,7045) 4371.49,7068 4425,7068 ccw(c4425,7105) 4462,7105 4462,7288.07 ccw(c4440,7288.07) 4440,7310.07 ccw(c4440,7285.07) 4415,7285.14 ccw(c4440,7285.07) 4415,7285.07 4415,7118 cw(c4402,7118) 4402,7105 cw(c4402,7115) 4392,7115 4392,7293 ccw(c4370,7293) 4370,7315 ccw(c4370,7290) 4345,7290.07 ccw(c4370,7290) 4345,7290 4345,7123 cw(c4332,7123) 4332,7110 cw(c4332,7120) 4322,7120 4322,7293 ccw(c4300,7293) 4300,7315 ccw(c4300,7290) 4275,7290.07 ; 4463,6860.5 ccw(c4483,6860.5) 4483,6840.5 ccw(c4483,6862.5) 4505,6862.43 ; 4463,6860.52 4463,6900 ccw(c4453,6900) 4453,6910 4406.97,6910 4205,7111.97 4205,7235 cw(c4230,7235) 4230,7260 cw(c4230,7238) 4252,7238 4252,7132.96 ccw(c4262,7133) 4262,7123 ccw(c4262,7136) 4275,7136 4275,7290.07 ; 4505,6860 4505,6862.43 ; v1(4960,7038.43) 4947,7025.43 4947,7000 4940,6993 4940,6888 cw(c4910,6888) 4910,6858 4640,6858 cw(c4640,6880) 4618,6880 4618,6900 cw(c4645,6900) 4645,6927 4696.97,6927 4706.97,6917 4862,6917 ccw(c4862,6935) 4880,6935 4880,6980 ccw(c4865,6980) 4865,6995 4645,6995 4558,6908 cw(c4542.44,6923.56) 4526.89,6908 cw(c4541.03,6922.14) 4526.89,6936.28 4586.54,6995.94 ccw(c4580.86,7001.57) 4586.51,7007.23 ccw(c4579.44,7000.15) 4572.37,7007.23 4505,6939.85 4505,6862.43
IL1.SDR.G8.D2_P: J1.315 J2.305 | length 5655.4
  TOP w4: v1(2900.7,7036.61) 2900.7,7061.3 2892,7070 2892,7105 2897,7110 3470,7110 3519,7061 3519,7004 ccw(c3553,7004) 3553,6970 3610,6970 3636,6944 3636,6904 ccw(c3655,6904) 3655,6885 4019.85,6885 4029.85,6895 4137.4,7002.54 4332.46,7002.54 4340,6995 4370,6995 v1(4378,6987)
  S2(H) w4: 4240,7133 ccw(c4262,7133) 4240,7132.93 ; 4298.08,7035.86 cw(c4301.62,7039.39) 4298.08,7042.93 4307.08,7051.92 ; 4298.94,7035 4411.94,6922 4453,6922 cw(c4453,6900) 4475,6900 4475,6860.5 ccw(c4483,6860.5) 4483,6852.5 ccw(c4483,6862.5) 4493,6862.46 4493,6944.82 4563.89,7015.71 cw(c4579.44,7000.15) 4595,7015.71 cw(c4580.86,7001.57) 4595.03,6987.46 4535.37,6927.8 ccw(c4541.03,6922.14) 4535.37,6916.49 ccw(c4542.44,6923.56) 4549.51,6916.49 4640.03,7007 4865,7007 cw(c4865,6980) 4892,6980 4892,6935 cw(c4862,6935) 4862,6905 4702,6905 4692,6915 4645,6915 ccw(c4645,6900) 4630,6900 4630,6880 ccw(c4640,6880) 4640,6870 4910,6870 ccw(c4910,6888) 4928,6888 4928,6997.97 4935,7004.97 4935,7025 v1(4924.57,7035.43) ; 4300.01,7058.99 4291.01,7050 cw(c4287.48,7053.54) 4283.94,7050 4217,7116.94 4217,7235 cw(c4230,7235) 4230,7248 cw(c4230,7238) 4240,7238 4240,7132.93 ; 4300.08,7059.07 cw(c4303.62,7055.54) 4307.15,7059.07 cw(c4303.62,7055.54) 4307.15,7052 ; v1(4378,6987) 4370,6995 4355.04,6995 4338,7012.04 4336.49,7013.56 4336.49,7049.97 cw(c4366.51,7049.97) 4366.51,7080 4425,7080 ccw(c4425,7105) 4450,7105 4450,7288.07 ccw(c4440,7288.07) 4440,7298.07 ccw(c4440,7285.07) 4427,7285.12 ccw(c4440,7285.07) 4427,7285.07 4427,7118 cw(c4402,7118) 4402,7093 cw(c4402,7115) 4380,7115 4380,7293 ccw(c4370,7293) 4370,7303 ccw(c4370,7290) 4357,7290.05 ccw(c4370,7290) 4357,7290 4357,7123 cw(c4332,7123) 4332,7098 cw(c4332,7120) 4310,7120 4310,7293 ccw(c4300,7293) 4300,7303 ccw(c4300,7290) 4287,7290.05 ccw(c4300,7290) 4287,7290 4287,7136 cw(c4262,7136) 4262,7111 cw(c4262,7133) 4240,7132.93
IL1.SDR.G8.D3_N: J1.306 J2.309 | length 5744.8
  S1(V) w4: v1(2862.2,7248.11) 2862.2,7232.2 2857,7227 2848,7227 2845,7230 2845,7255 2855,7265 3234.09,7265 3350,7149.09 3350,7125 3342,7117 3255,7117 cw(c3255,7122) 3250,7122 3250,7155 ccw(c3245,7155) 3245,7160 ccw(c3245,7155) 3240,7155 3240,7125 cw(c3232,7125) 3232,7117 2987,7117 ccw(c2987,7090) 2960,7090 ccw(c2985,7090) 2985,7065 3434.09,7065 4146.09,6353 4880,6353 ccw(c4880,6375) 4902,6375 ccw(c4882,6375) 4882,6395 4580,6395 cw(c4580,6400) 4575,6400 4575,6403 cw(c4582,6403) 4582,6410 4918.06,6410 ccw(c4918.06,6429.13) 4937.2,6429.13 4937.2,6430.08 ccw(c4920.28,6430.08) 4920.28,6447 4633,6447 cw(c4633,6452) 4628,6452 4628,6455 cw(c4635,6455) 4635,6462 4849,6462 ccw(c4849,6485) 4872,6485 4872,6514.55 4893.72,6536.28 v1(4905.04,6536.28)
  S6(H) w4: v1(4905.04,6536.28) 4905.04,6547.59 4930,6572.55 4930,6595.03 cw(c4937.97,6595.03) 4937.97,6603 4985,6603 ccw(c4985,6625) 5007,6625 ccw(c4987,6625) 4987,6645 4940,6645 cw(c4940,6655) 4930,6655 4930,6675.03 cw(c4937.97,6675.03) 4937.97,6683 4985,6683 ccw(c4985,6705) 5007,6705 ccw(c4987,6705) 4987,6725 ; 4985,6725 4940,6725 cw(c4940,6735) 4930,6735 4930,6755.03 cw(c4937.97,6755.03) 4937.97,6763 4985,6763 ccw(c4985,6785) 5007,6785 ccw(c4987,6785) 4987,6805 4940,6805 cw(c4940,6815) 4930,6815 4930,6949 4989.17,7008.17 4989.17,7072.83 v1(5002.95,7086.61)
IL1.SDR.G8.D3_P: J1.305 J2.308 | length 5749.8
  S1(V) w4: v1(2900.7,7186.61) 2900.7,7196.3 2882,7215 2840,7215 2833,7222 2833,7259.97 2850.03,7277 3239.06,7277 3362,7154.06 3362,7120.03 3358.49,7116.51 3346.97,7105 2987,7105 ccw(c2987,7090) 2972,7090 ccw(c2985,7090) 2985,7077 3439.06,7077 4151.06,6365 4880,6365 ccw(c4880,6375) 4890,6375 ccw(c4882,6375) 4882,6383 4580,6383 cw(c4580,6400) 4563,6400 4563,6403 cw(c4582,6403) 4582,6422 4918.06,6422 ccw(c4918.06,6429.13) 4925.2,6429.13 4925.2,6430.08 ccw(c4920.28,6430.08) 4920.28,6435 4633,6435 cw(c4633,6452) 4616,6452 4616,6455 cw(c4635,6455) 4635,6474 4849,6474 ccw(c4849,6485) 4860,6485 4860,6519.52 4885.24,6544.76 v1(4885.24,6556.07)
  S6(H) w4: v1(4885.24,6556.07) 4896.55,6556.07 4918,6577.52 4918,6600 cw(c4933,6600) 4933,6615 4985,6615 ccw(c4985,6625) 4995,6625 ccw(c4987,6625) 4987,6633 4940,6633 cw(c4940,6655) 4918,6655 4918,6680 cw(c4933,6680) 4933,6695 4985,6695 ccw(c4985,6705) 4995,6705 ccw(c4987,6705) 4987,6713 ; v1(4961.81,7098.11) 4977.17,7082.75 4977.17,7013.14 4918,6953.97 4918,6815 ccw(c4940,6815) 4940,6793 4987,6793 cw(c4987,6785) 4995,6785 cw(c4985,6785) 4985,6775 4933,6775 ccw(c4933,6760) 4918,6760 4918,6735 ccw(c4940,6735) 4940,6713 4985,6713
IL1.SDR.G13.C_N: J1.283 J2.283 | length 5849
  S1(V) w4: v1(4208,7591) 4216,7583 4275,7583 4293,7601 4293,7617 ccw(c4285,7617) 4285,7625 4220,7625 cw(c4220,7642) 4203,7642 4203,7645 cw(c4220,7645) 4220,7662 4280.03,7662 ccw(c4280.03,7674.97) 4293,7674.97 4293,7685 ccw(c4285,7685) 4285,7693 4220,7693 cw(c4220,7710) 4203,7710 4203,7713 cw(c4220,7713) 4220,7730 4280.03,7730 ccw(c4280.03,7742.97) 4293,7742.97 ccw(c4285,7742.97) 4285,7750.97 4220,7750.97 cw(c4220,7767.97) 4203,7767.97 4203,7770.97 cw(c4220,7770.97) 4220,7787.97 4300,7787.97 ccw(c4300,7792.97) 4305,7792.97 4305,7805 cw(c4322,7805) 4322,7822 4325,7822 cw(c4325,7805) 4342,7805 4342,7790 ccw(c4345,7790) 4345,7787 5028,7787 cw(c5028,7750) 5065,7750 5065,7611 ccw(c5075,7611) 5075,7601 ccw(c5075,7609) 5083,7609 5083,7769 cw(c5105,7769) 5105,7791 cw(c5105,7771) 5125,7771 5125,7609 ccw(c5135,7609) 5135,7599 ccw(c5135,7607) 5143,7607 5143,7767 cw(c5165,7767) 5165,7789 cw(c5165,7769) 5185,7769 5185,7607 ccw(c5195,7607) 5195,7597 ccw(c5195,7605) 5203,7605 5203,7770 cw(c5225,7770) 5225,7792 cw(c5225,7772) 5245,7772 5245,7605 ccw(c5255,7605) 5255,7595 ccw(c5255,7603) 5263,7603 5263,7770 cw(c5285,7770) 5285,7792 cw(c5285,7770) 5307,7770 5307,7607 cw(c5255,7607) 5255,7555 5120,7555 ccw(c5120,7527) 5092,7527 5092,7228 5100.31,7219.69 v1(5100.31,7186.61)
  S5(V) w4: v1(2762.2,6948.11) 2787.09,6923.23 2825,6923.23 2831,6929.23 2831,6969.97 2854.03,6993 3462.09,6993 4052.09,7583 4200,7583 v1(4208,7591)
  BOT w4: v1(2762.2,6948.11) 2773.71,6948.11 J2.283@2787.21,6961.61 ; J1.283@5086.81,7211.61 5100.31,7198.11 v1(5100.31,7186.61)
IL1.SDR.G13.C_P: J1.282 J2.282 | length 5836.6
  S1(V) w4: v1(4208,7563) 4216,7571 4270.03,7571 4279.97,7571 4305,7596.03 4305,7617 ccw(c4285,7617) 4285,7637 4220,7637 cw(c4220,7642) 4215,7642 4215,7645 cw(c4220,7645) 4220,7650 4285,7650 ccw(c4285,7670) 4305,7670 4305,7685 ccw(c4285,7685) 4293,7703.33 ccw(c4285,7685) 4285,7705 4220,7705 cw(c4220,7710) 4215,7710 4215,7713 cw(c4220,7713) 4220,7718 4285,7718 ccw(c4285,7738) 4293,7719.67 ccw(c4285,7738) 4305,7738 4305,7742.97 ccw(c4285,7742.97) 4285,7762.97 4220,7762.97 cw(c4220,7767.97) 4215,7767.97 4215,7770.97 cw(c4220,7770.97) 4220,7775.97 4300,7775.97 ccw(c4300,7792.97) 4317,7792.97 4317,7805 cw(c4322,7805) 4322,7810 4325,7810 cw(c4325,7805) 4330,7805 4330,7790 ccw(c4345,7790) 4345,7775 5023.03,7775 cw(c5023.03,7745.03) 5053,7745.03 5053,7611 ccw(c5075,7611) 5075,7589 ccw(c5075,7609) 5095,7609 5095,7769 cw(c5105,7769) 5105,7779 cw(c5105,7771) 5113,7771 5113,7609 ccw(c5135,7609) 5135,7587 ccw(c5135,7607) 5155,7607 5155,7767 cw(c5165,7767) 5165,7777 cw(c5165,7769) 5173,7769 5173,7607 ccw(c5195,7607) 5195,7585 ccw(c5195,7605) 5215,7605 5215,7770 cw(c5225,7770) 5225,7780 cw(c5225,7772) 5233,7772 5233,7605 ccw(c5255,7605) 5255,7583 ccw(c5255,7603) 5275,7603 5275,7770 cw(c5285,7770) 5285,7780 cw(c5285,7770) 5295,7770 5295,7611.97 cw(c5250.03,7611.97) 5250.03,7567 5120,7567 ccw(c5120,7527) 5080,7527 5080,7250 5080,7223.03 5080,7210 5075,7205 5065,7205 5061.81,7208.19 v1(5061.81,7248.11)
  S5(V) w4: v1(2800.7,6886.61) 2800.7,6902.52 2809.41,6911.23 2829.97,6911.23 2843,6924.26 2843,6965 2859,6981 3467.06,6981 4057.06,7571 4200,7571 v1(4208,7563)
  BOT w4: J2.282@2787.21,6911.61 2800.71,6898.11 v1(2800.7,6886.61) ; v1(5061.81,7248.11) 5073.31,7248.11 J1.282@5086.81,7261.61
IL1.SDR.G13.D0_N: J1.286 J2.286 | length 5713.5
  TOP w4: v1(2762.2,7098.11) 2762.2,7072.8 2770,7065 2775,7065 2780,7070 2780,7105.1 2800.73,7125.83 2811.91,7125.83 2856.09,7170 3494.85,7170 3719.85,6945 3995,6945 4120,7070 4451.97,7070 4469.97,7052 4485,7052 v1(4493,7060)
  S2(H) w4: v1(4493,7060) 4501,7052 4512,7052 4518,7058 4518,7112 4490,7140 4486.49,7143.51 4486.49,7474.41 cw(c4517.08,7474.41) 4517.08,7505 4530.03,7505 ; 4531,7505 5192,7505 cw(c5192,7485) 5212,7485 cw(c5190,7485) 5190,7463 4548,7463 ccw(c4548,7455) 4540,7455 ccw(c4548,7455) 4548,7447 5510,7447 cw(c5510,7425) 5532,7425 cw(c5507,7425) 5507,7400 5115,7400 ccw(c5115,7377) 5092,7377 5092,7205.09 5078.49,7191.57 5078.49,7173.49 5085,7166.97 5085,7116.77 5092,7109.77 5092,7068 5100.31,7059.69 v1(5100.31,7036.61)